# EAGLE board ESC_logic (EAGLE 9.0.0)
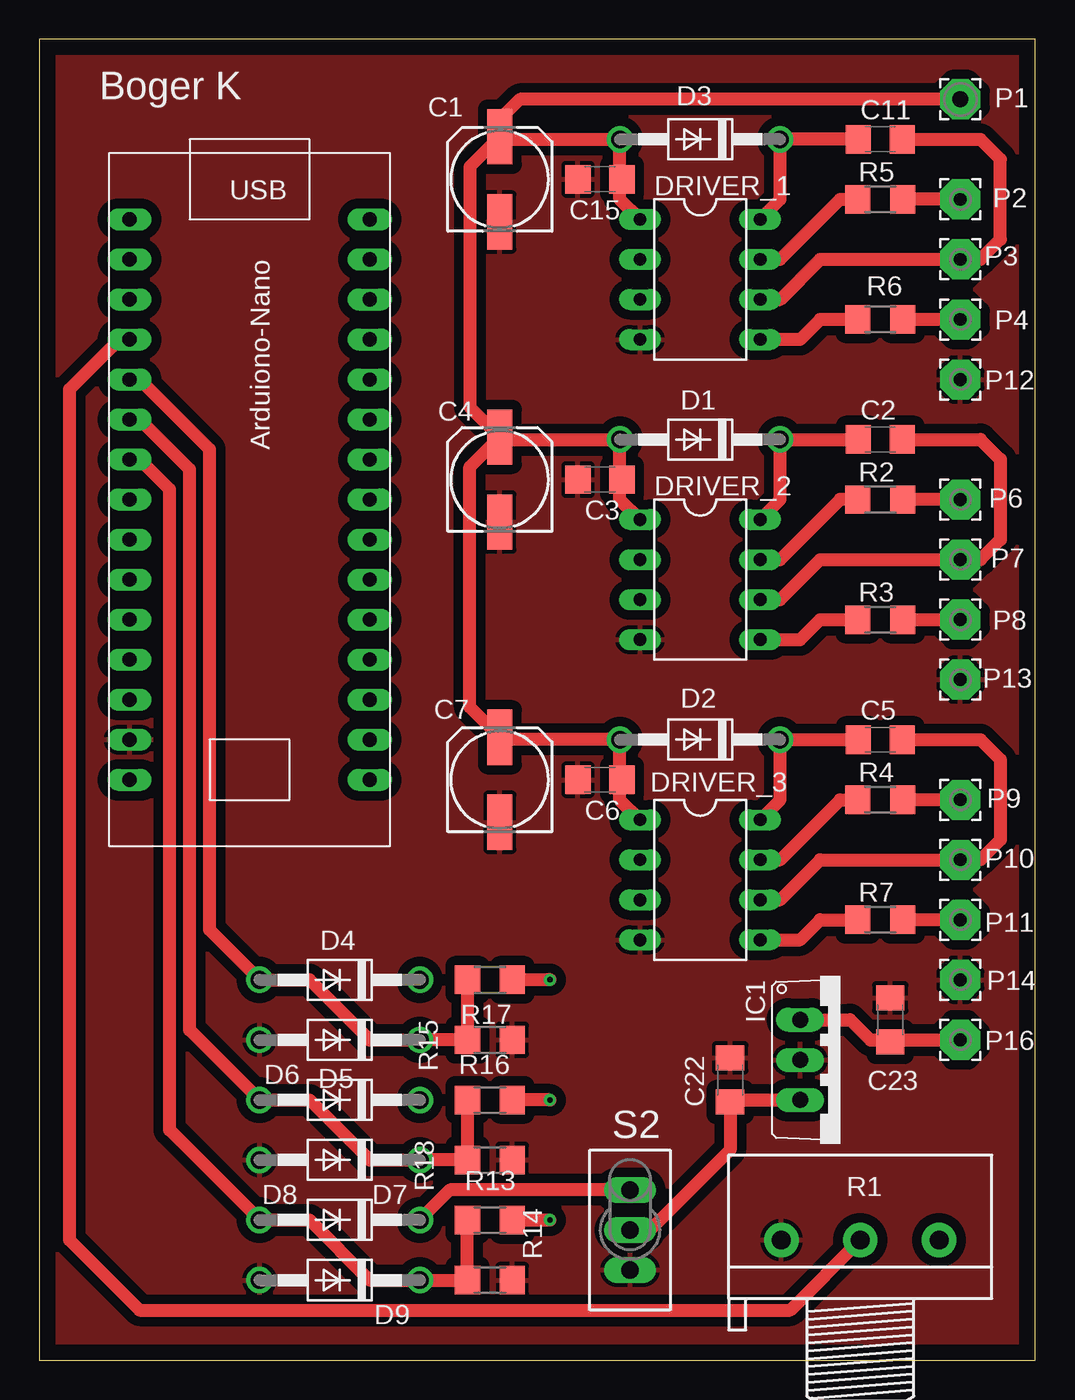
[diagram p0: board, top side]
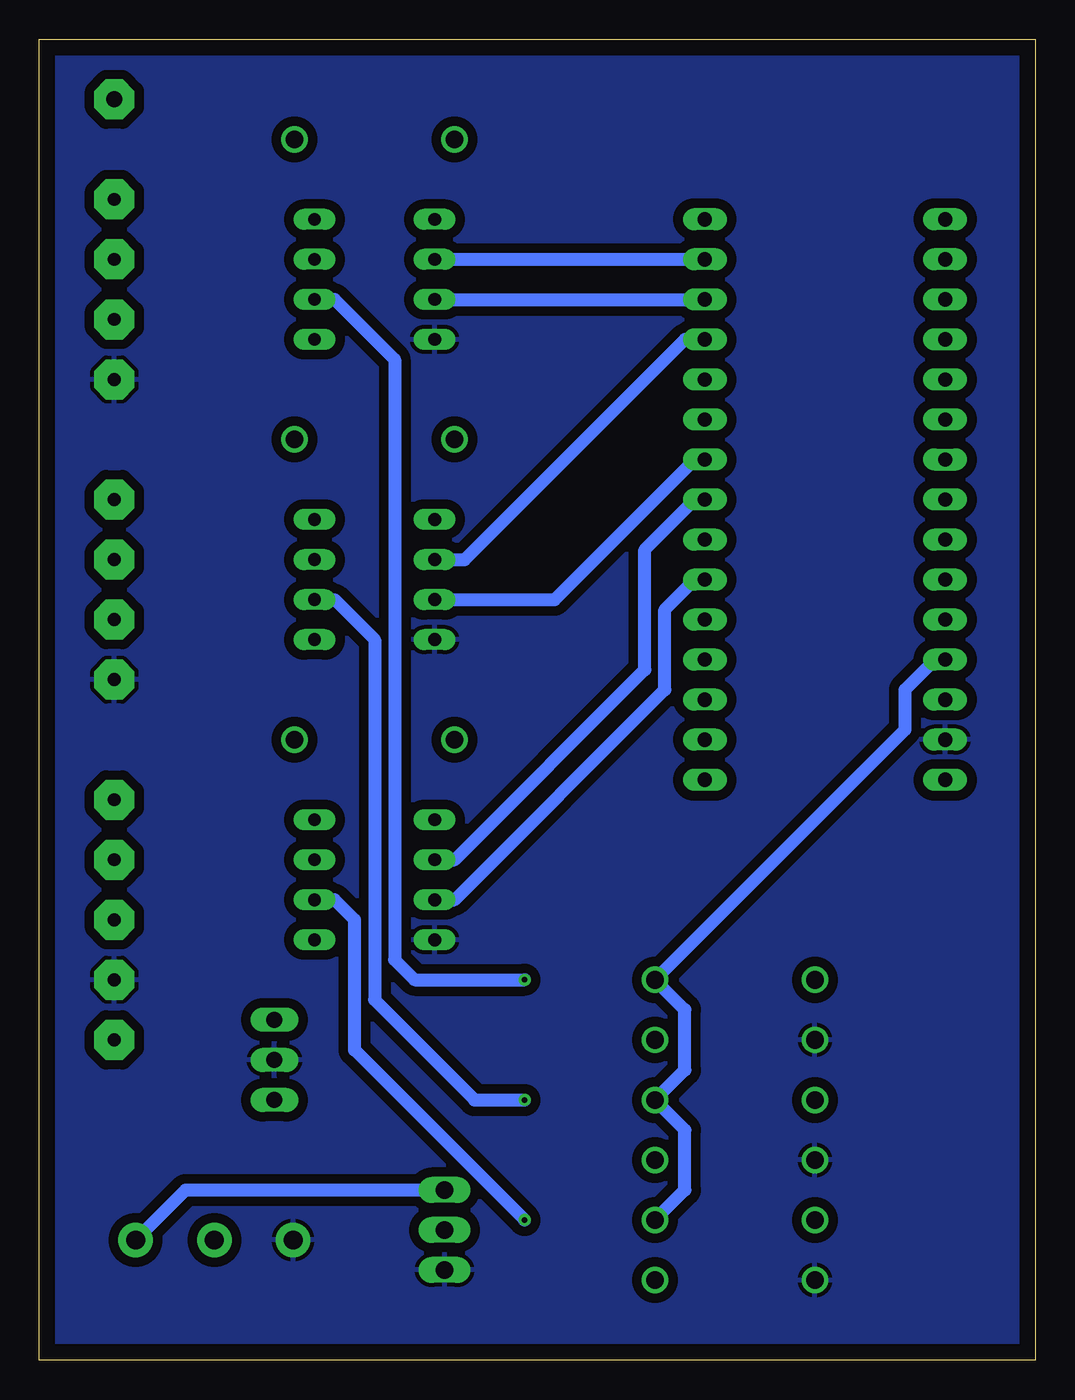
[diagram p1: board, bottom side, seen from below]

Size 63.17 x 83.81 mm. Coordinates in mm from the lower left corner, seen from the top.
Outline: 0,0 63.17,0 63.17,83.81 0,83.81 0,0
Copper layers (1*16): Top 0.035mm / dielectric 1.5mm / Bottom 0.035mm
Design rules "default": minimum track width 6mil, minimum drill 0.35mm, track to track 6mil, track to pad 6mil, pad to pad 6mil, via to via 6mil, smd to smd 6mil, copper to edge 40mil, drill to drill 6mil, minimum pad ring 10mil, minimum via ring 8mil, stop-mask expansion 4mil, vias tented up to drill 0mil, thermal gap 10mil

## Footprints (pad centres in the part's own frame; a part is rotated, then mirrored left to right if it is on the bottom)
153CLV-0605 = smd 3.5 x 1.6: + 2.7,0; - -2.7,0
C1206 = smd 1.6 x 1.8: 1 -1.4,0; 2 1.4,0
DO41-10 = drill 1.118: A 5.08,0; C -5.08,0
DIL08 = drill 0.813 long: 1 -3.81,-3.81; 2 -1.27,-3.81; 3 1.27,-3.81; 4 3.81,-3.81; 5 3.81,3.81; 6 1.27,3.81; 7 -1.27,3.81; 8 -3.81,3.81
TO220V = drill 1.016 long: 1 -2.54,-2.54; 2 0,-2.54; 3 2.54,-2.54
2,54/1,0 = drill 1.016 pad 2.54 octagon: 1 0,0
2,54/0,8 = drill 0.813 pad 2.54 octagon: 1 0,0
3RP/1610N = drill 1.2 pad 2.184: 1 -5,0; 2 0,0; 3 5,0
R1206 = smd 1.6 x 1.803: 1 -1.422,0; 2 1.422,0
TL3XPO = drill 1.1 pad 1.422 long: 1 -2.54,0; 2 0,0; 3 2.54,0
ARDUINO-NANO = drill 0.9 long: 3V3 -15.24,-7.62; 5V 10.16,-7.62; A0 -10.16,-7.62; A1 -7.62,-7.62; A2 -5.08,-7.62; A3 -2.54,-7.62; A4 0,-7.62; A5 2.54,-7.62; A6 5.08,-7.62; A7 7.62,-7.62; AREF -12.7,-7.62; D0 15.24,7.62; D1 17.78,7.62; D2 7.62,7.62; D3 5.08,7.62; D4 2.54,7.62; D5 0,7.62; D6 -2.54,7.62; D7 -5.08,7.62; D8 -7.62,7.62; D9 -10.16,7.62; D10 -12.7,7.62; D11 -15.24,7.62; D12 -17.78,7.62; D13 -17.78,-7.62; GND 15.24,-7.62; GND1 10.16,7.62; RES 12.7,7.62; RESET 12.7,-7.62; VIN 17.78,-7.62

## Placement (x,y rotation side)
C1  10u  [153CLV-0605]  29.21,74.93 90 top
C2  0.1u  [C1206]  53.34,58.42 0 top
C3  0.1u  [C1206]  35.56,55.88 180 top
C4  10u  [153CLV-0605]  29.21,55.88 90 top
C5  0.1u  [C1206]  53.34,39.37 0 top
C6  0.1u  [C1206]  35.56,36.83 180 top
C7  10u  [153CLV-0605]  29.21,36.83 90 top
C11  0.1u  [C1206]  53.34,77.47 0 top
C15  0.1u  [C1206]  35.56,74.93 180 top
C22  0.22u  [C1206]  43.81,17.78 90 top
C23  0.33u  [C1206]  53.98,21.59 90 top
D1  1n4148  [DO41-10]  41.91,58.42 180 top
D2  1n4148  [DO41-10]  41.91,39.37 180 top
D3  1n4148  [DO41-10]  41.91,77.47 180 top
D4  1N4148  [DO41-10]  19.05,24.13 180 top
D5  1N4148  [DO41-10]  19.05,20.32 180 top
D6  1N4148  [DO41-10]  19.05,16.51 180 top
D7  1N4148  [DO41-10]  19.05,12.7 180 top
D8  1N4148  [DO41-10]  19.05,8.89 180 top
D9  1N4148  [DO41-10]  19.05,5.08 180 top
DRIVER_1  IR2301  [DIL08]  41.91,68.58 270 top
DRIVER_2  IR2301  [DIL08]  41.91,49.53 270 top
DRIVER_3  IR2301  [DIL08]  41.91,30.48 270 top
IC1  7805TV  [TO220V]  50.8,19.05 270 top
P1  WIREPAD2,54/1,0  [2,54/1,0]  58.42,80.01 0 top
P2  WIREPAD2,54/0,8  [2,54/0,8]  58.42,73.66 0 top
P3  WIREPAD2,54/0,8  [2,54/0,8]  58.42,69.85 0 top
P4  WIREPAD2,54/0,8  [2,54/0,8]  58.42,66.04 0 top
P6  WIREPAD2,54/0,8  [2,54/0,8]  58.42,54.61 0 top
P7  WIREPAD2,54/0,8  [2,54/0,8]  58.42,50.8 0 top
P8  WIREPAD2,54/0,8  [2,54/0,8]  58.42,46.99 0 top
P9  WIREPAD2,54/0,8  [2,54/0,8]  58.42,35.56 0 top
P10  WIREPAD2,54/0,8  [2,54/0,8]  58.42,31.75 0 top
P11  WIREPAD2,54/0,8  [2,54/0,8]  58.42,27.94 0 top
P12  WIREPAD2,54/0,8  [2,54/0,8]  58.42,62.23 0 top
P13  WIREPAD2,54/0,8  [2,54/0,8]  58.42,43.18 0 top
P14  WIREPAD2,54/0,8  [2,54/0,8]  58.42,24.13 0 top
P16  WIREPAD2,54/0,8  [2,54/0,8]  58.42,20.32 0 top
R1  10k  [3RP/1610N]  52.07,7.62 0 top
R2  100  [R1206]  53.34,54.61 0 top
R3  100  [R1206]  53.34,46.99 0 top
R4  100  [R1206]  53.34,35.56 0 top
R5  100  [R1206]  53.34,73.66 0 top
R6  100  [R1206]  53.34,66.04 0 top
R7  100  [R1206]  53.34,27.94 0 top
R13  2.4k  [R1206]  28.57,8.89 180 top
R14  1k  [R1206]  28.57,5.08 180 top
R15  1k  [R1206]  28.57,20.32 180 top
R16  2.4k  [R1206]  28.57,16.51 180 top
R17  2.4k  [R1206]  28.57,24.13 180 top
R18  1k  [R1206]  28.57,12.7 180 top
S2  TL32PO  [TL3XPO]  37.47,8.26 270 top
U$7  ARDUINO-NANO  [ARDUINO-NANO]  13.34,54.61 270 top

## Library data of the parts
C1 C4 C7 = resistor
C2 C3 C5 C6 C11 C15 C22 C23 = Kondensator.
D1-D9 = diode
DRIVER_1-DRIVER_3 = kirill; AVAILABILITY: Unavailable; DESCRIPTION: High and Low Side Driver, Noninverting Inputs; MF: Infineon; MP: IR2301; PACKAGE: DIP-8 International Rectifier; PRICE: None
IC1 = linear
P1-P4 P6-P14 P16 = wirepad
R1 = pot
R2-R7 R13-R18 = Widerstände; SPICEPREFIX: R
S2 = switch
U$7 = Arduino-nano

## Nets
5V: D4.C D6.C D8.C R1.3 S2.1 U$7.5V
A1: D4.A D5.C R15.2 R17.2 U$7.A1
A2: D6.A D7.C R16.2 R18.2 U$7.A2
A3: D8.A D9.C R13.2 R14.2 U$7.A3
GND: C1.- C3.2 C4.- C6.2 C7.- C15.2 C22.2 C23.2 D5.A D7.A D9.A DRIVER_1.4 DRIVER_2.4 DRIVER_3.4 IC1.2 P12.1 P13.1 P14.1 R1.1 R14.1 R15.1 R18.1 S2.3 U$7.GND
HIN_D1: DRIVER_1.2 U$7.D11
HIN_D2: DRIVER_2.2 U$7.D9
HIN_D3: DRIVER_3.2 U$7.D5
LIN_D1: DRIVER_1.3 U$7.D10
LIN_D2: DRIVER_2.3 U$7.D6
LIN_D3: DRIVER_3.3 U$7.D3
N$1: DRIVER_2.7 R2.1
N$2: DRIVER_2.5 R3.1
N$3: P6.1 R2.2
N$4: P8.1 R3.2
N$5: DRIVER_3.7 R4.1
N$6: DRIVER_3.5 R7.1
N$7: P9.1 R4.2
N$8: P11.1 R7.2
N$15: DRIVER_1.7 R5.1
N$18: DRIVER_1.5 R6.1
N$19: P2.1 R5.2
N$20: P4.1 R6.2
PHASE_1: C11.2 DRIVER_1.6 P3.1 R17.1
PHASE_2: C2.2 DRIVER_2.6 P7.1 R16.1
PHASE_3: C5.2 DRIVER_3.6 P10.1 R13.1
POT: R1.2 U$7.A0
VB: C11.1 D3.C DRIVER_1.8
VB2: C2.1 D1.C DRIVER_2.8
VB3: C5.1 D2.C DRIVER_3.8
VCC: C1.+ C3.1 C4.+ C6.1 C7.+ C15.1 D1.A D2.A D3.A DRIVER_1.1 DRIVER_2.1 DRIVER_3.1 P1.1
VI: C23.1 IC1.1 P16.1
VO: C22.1 IC1.3 S2.2

## Tracks (layer width: path | path; a pad name or v marks a point on that pad's centre or on a via)
5V
  Top 0.813: S2.1 26.04,10.79 D8.C
  Bottom 0.813: D8.C 22.23,10.79 22.23,14.61 D6.C 22.23,18.41 22.23,22.23 D4.C 8.26,40.01 8.26,42.55 6.35,44.45 U$7.5V | R1.3 53.9,10.79 S2.1
A1
  Top 0.813: R17.2 R15.2 D5.C 20.95,20.32 17.14,24.13 D4.A 10.79,27.3 10.79,57.78 6.35,62.23 U$7.A1
A2
  Top 0.813: R16.2 R18.2 D7.C 20.95,12.7 17.14,16.51 D6.A 9.53,20.95 9.53,56.52 6.35,59.69 U$7.A2
A3
  Top 0.813: R13.2 R14.2 D9.C 20.95,5.08 17.14,8.89 D8.A 8.26,14.61 8.26,55.24 6.35,57.15 U$7.A3
GND
  pour Top (isolate 0.61): 0,83.82 63.5,83.82 63.5,0 0,0
  pour Bottom (isolate 0.61): 63.5,83.82 0,83.82 0,0 63.5,0
HIN_D1
  Bottom 0.813: DRIVER_1.2 U$7.D11
HIN_D2
  Bottom 0.813: DRIVER_2.2 36.2,50.8 22.23,64.77 U$7.D9
HIN_D3
  Bottom 0.813: U$7.D5 21.59,54.61 24.77,51.44 24.77,43.81 36.83,31.75 DRIVER_3.2
LIN_D1
  Bottom 0.813: DRIVER_1.3 U$7.D10
LIN_D2
  Bottom 0.813: DRIVER_2.3 30.48,48.26 21.59,57.15 U$7.D6
LIN_D3
  Bottom 0.813: U$7.D3 21.59,49.53 23.5,47.62 23.5,42.55 36.83,29.21 DRIVER_3.3
N$1
  Top 0.813: R2.1 50.8,54.61 46.99,50.8 DRIVER_2.7
N$2
  Top 0.813: DRIVER_2.5 48.26,45.72 49.53,46.99 R3.1
N$3
  Top 0.813: 54.61,54.61 R2.2 P6.1
N$4
  Top 0.813: R3.2 P8.1
N$5
  Top 0.813: DRIVER_3.7 46.99,31.75 50.8,35.56 R4.1
N$6
  Top 0.813: DRIVER_3.5 48.26,26.67 49.53,27.94 R7.1
N$7
  Top 0.813: P9.1 R4.2
N$8
  Top 0.813: P11.1 R7.2
N$15
  Top 0.813: DRIVER_1.7 46.99,69.85 50.8,73.66 R5.1
N$18
  Top 0.813: R6.1 49.53,66.04 48.26,64.77 DRIVER_1.5
N$19
  Top 0.813: P2.1 R5.2
N$20
  Top 0.813: P4.1 R6.2
PHASE_1  (via drill 0.35)
  Top 0.813: C11.2 59.69,77.47 60.96,76.2 60.96,71.12 59.69,69.85 P3.1 49.53,69.85 46.99,67.31 DRIVER_1.6 | v32.38,24.13 R17.1
  Bottom 0.813: DRIVER_1.6 44.45,67.31 40.64,63.5 40.64,25.4 39.37,24.13 v32.38,24.13
PHASE_2  (via drill 0.35)
  Top 0.813: C2.2 59.69,58.42 60.96,57.15 60.96,52.07 59.69,50.8 P7.1 49.53,50.8 46.99,48.26 DRIVER_2.6 | v32.38,16.51 R16.1
  Bottom 0.813: DRIVER_2.6 44.45,48.26 41.91,45.72 41.91,22.86 35.56,16.51 v32.38,16.51
PHASE_3  (via drill 0.35)
  Top 0.813: C5.2 59.69,39.37 60.96,38.1 60.96,33.02 59.69,31.75 P10.1 49.53,31.75 46.99,29.21 DRIVER_3.6 | R13.1 v32.38,8.89
  Bottom 0.813: DRIVER_3.6 44.45,29.21 43.18,27.94 43.18,19.68 v32.38,8.89
POT
  Top 0.813: R1.2 47.62,3.17 6.35,3.17 1.91,7.62 1.91,61.59 5.08,64.77 U$7.A0
VB
  Top 0.813: C11.1 D3.C 46.99,73.66 DRIVER_1.8
VB2
  Top 0.813: C2.1 D1.C 46.99,54.61 DRIVER_2.8
VB3
  Top 0.813: C5.1 D2.C 46.99,35.56 DRIVER_3.8
VCC
  Top 0.813: DRIVER_1.1 36.83,73.66 36.83,74.93 | 36.83,74.93 D3.A 29.37,77.47 C1.+ | C15.1 36.83,74.93 | C1.+ 29.21,78.74 30.48,80.01 P1.1 | C1.+ 27.3,75.72 27.3,60.48 C4.+ | DRIVER_2.1 36.83,54.61 36.83,55.88 | 36.83,55.88 D1.A 29.37,58.42 C4.+ | C3.1 36.83,55.88 | C4.+ 27.3,56.67 27.3,41.44 C7.+ 29.37,39.37 D2.A 36.83,36.83 | DRIVER_3.1 36.83,35.56 36.83,36.83 | C6.1 36.83,36.83
VI
  Top 0.813: P16.1 54.1,20.32 C23.1 53.84,20.32 52.7,20.32 51.44,21.59 IC1.1
VO
  Top 0.813: IC1.3 43.31,16.51 C22.1 43.81,13.34 38.73,8.26 S2.2

## Text on the board
tNames: Boger K